# Altium PCB handMpuPcb.PcbDoc
Units mm, origin at the board's own origin, x right, y up, seen from the top; angles counter-clockwise.
Board outline 39.35 x 41.85 mm, 2 copper layers (Top Layer, Bottom Layer); 45 components, 26 nets, 187 pads, 26 vias.
Unrouted connection lines stored in the file: 58.
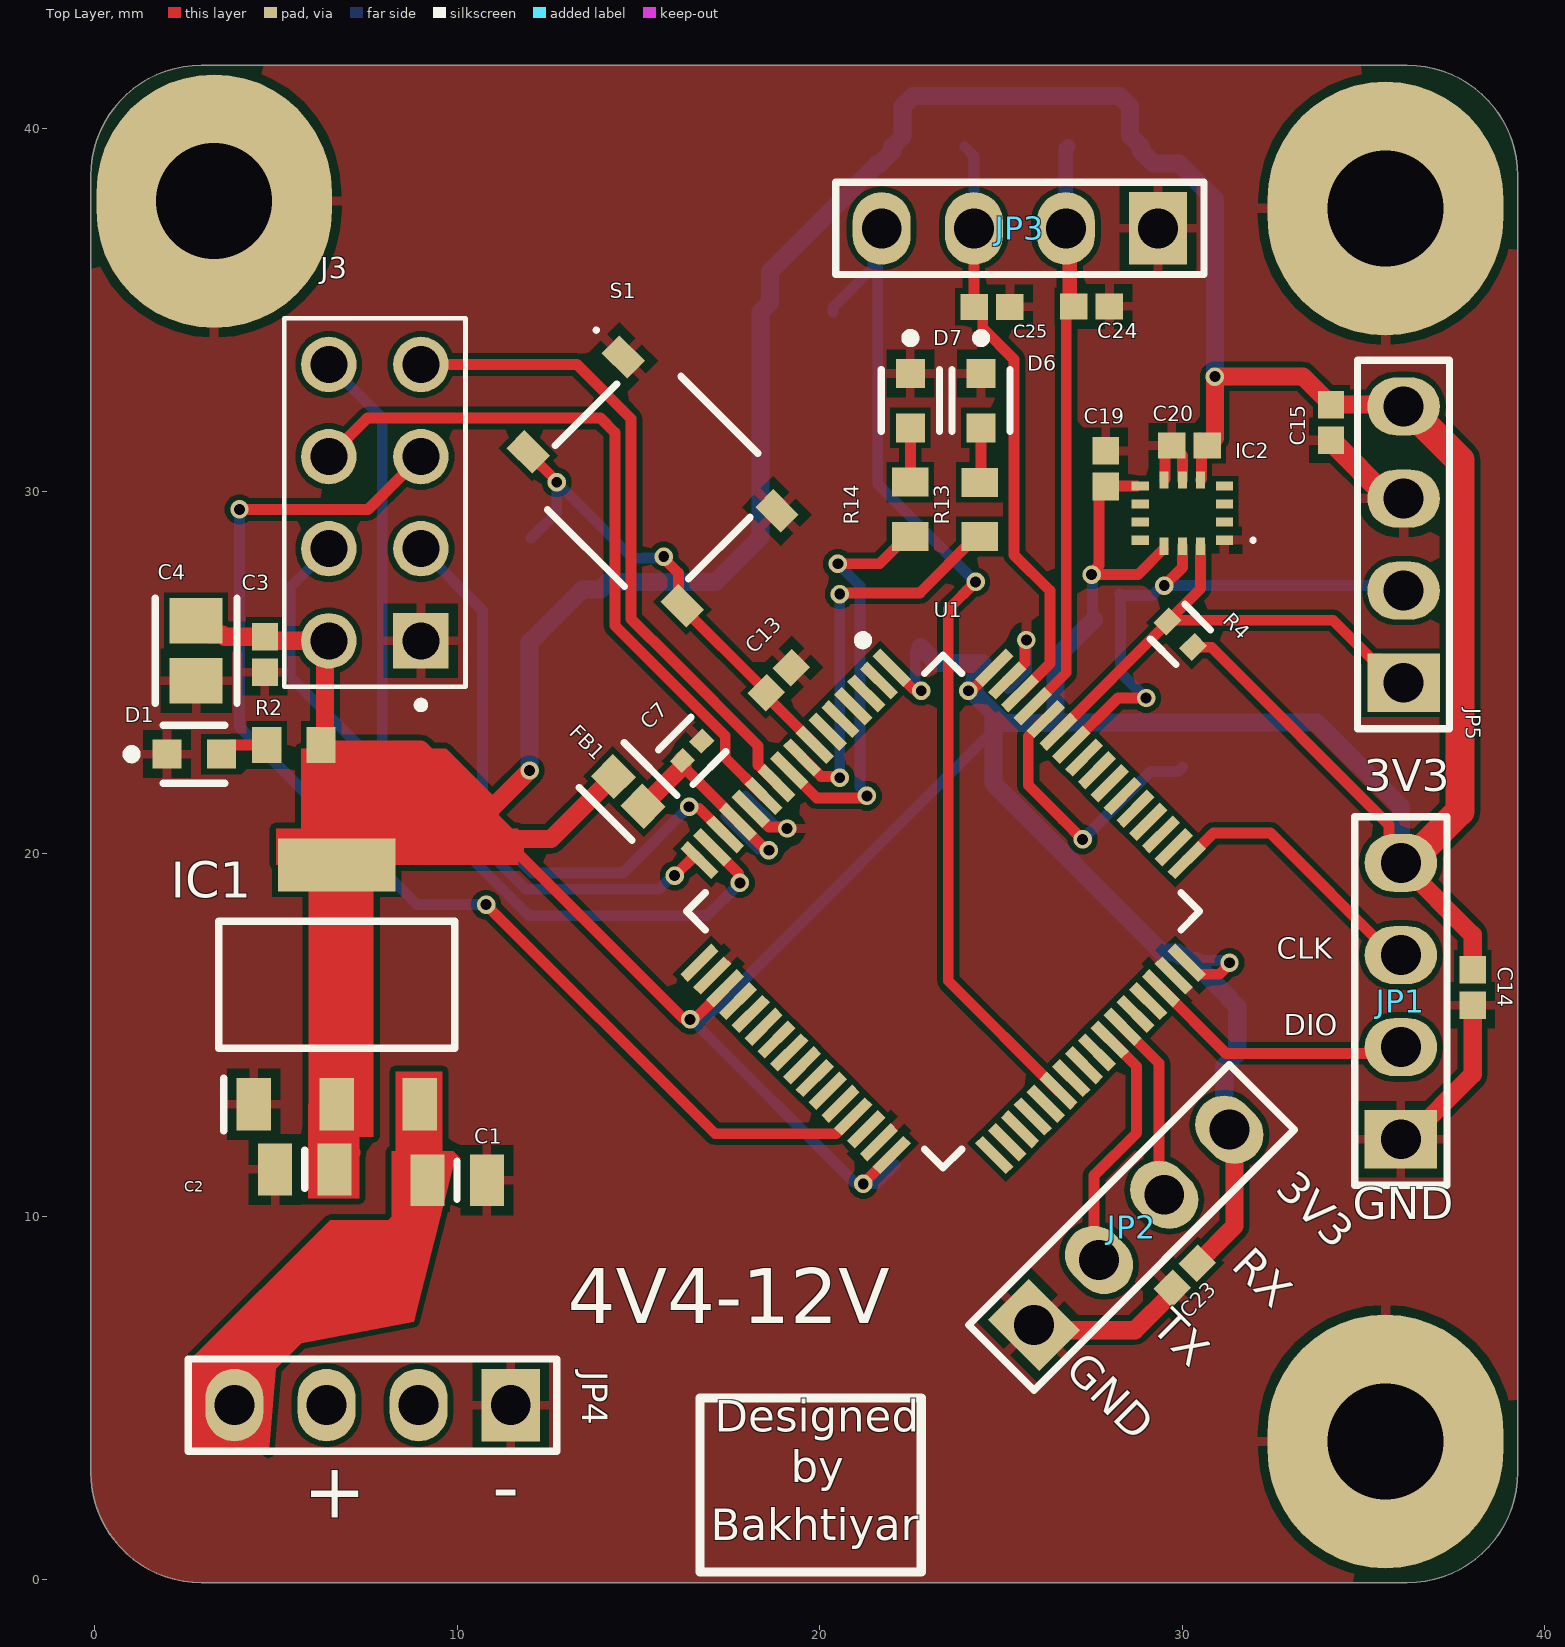
[diagram p0: Top Layer view]
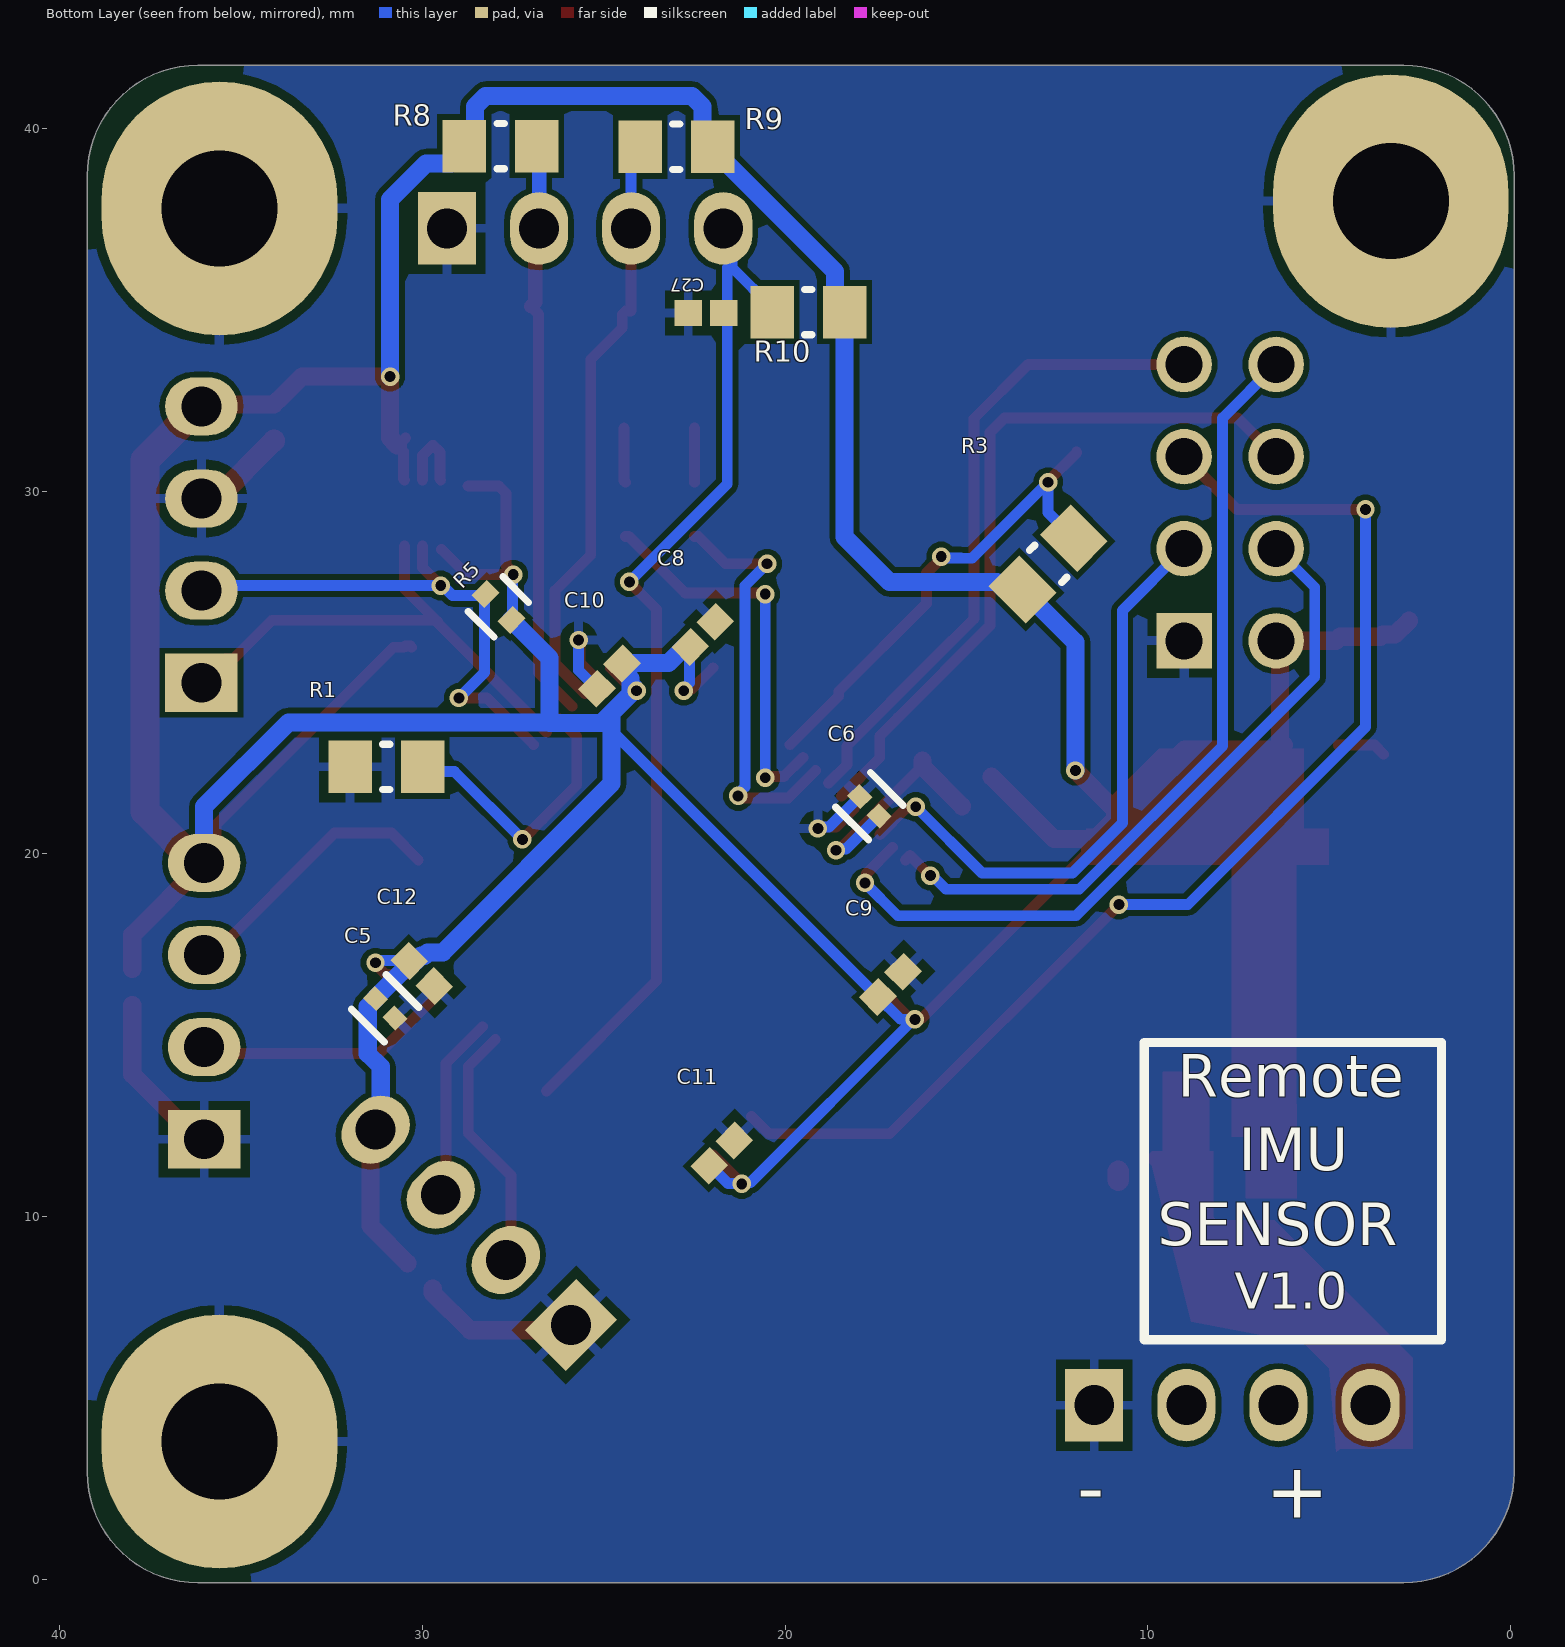
[diagram p1: Bottom Layer view, seen from below]
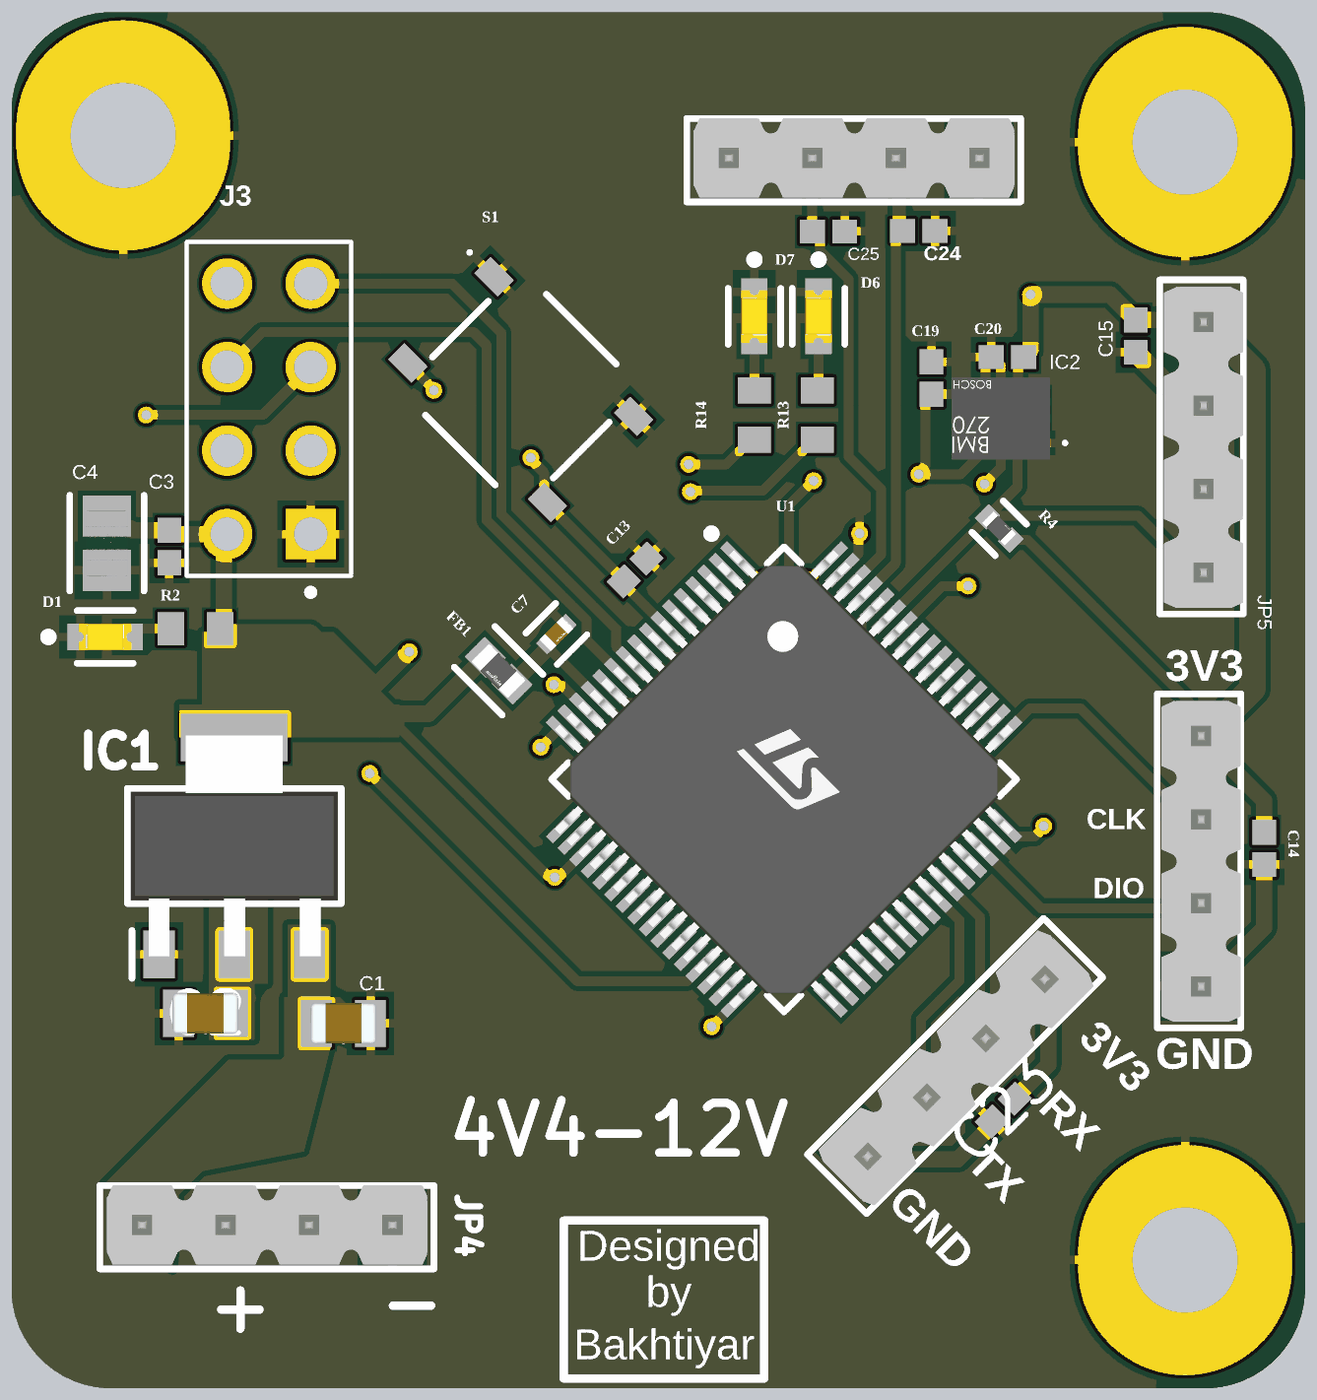
[diagram p2: 3D render of the assembled board from above, using the file's embedded part models]
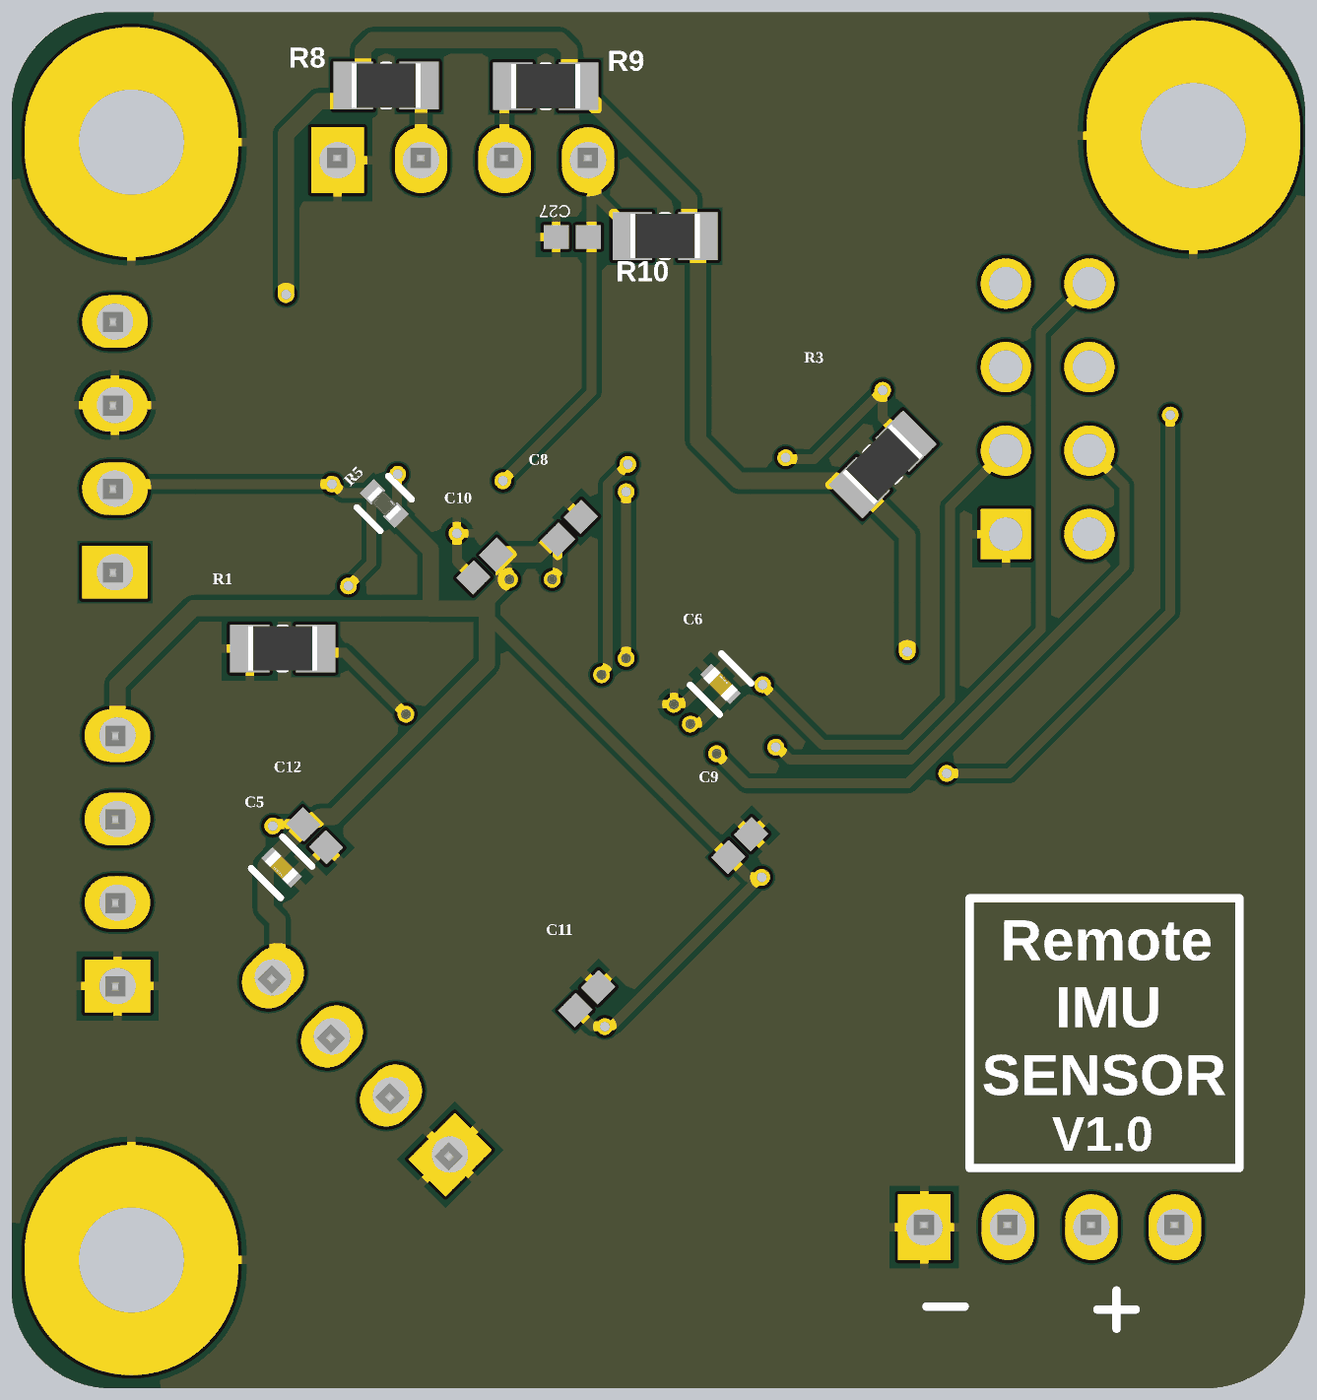
[diagram p3: 3D render of the assembled board from below, using the file's embedded part models]

## Layer stack, top to bottom
Top Solder: solder mask 0.0102, Solder Resist, Dk 3.5
Top Layer: signal copper 0.0356
Dielectric 1: dielectric 0.32, FR-4, Dk 4.8
Bottom Layer: signal copper 0.0356
Bottom Solder: solder mask 0.0102, Solder Resist, Dk 3.5

## Board outline
-0.1,2.948 -0.1,38.702 cw(c2.948,38.702) 2.948,41.75 36.202,41.75 cw(c36.202,38.702) 39.25,38.702 39.25,2.948 cw(c36.202,2.948) 36.202,-0.1 2.948,-0.1 cw(c2.948,2.948)

## Design rules (kind name [scope] priority, off if disabled: settings)
Clearance Clearance_USB_Polygon [(InNet('USB_D_N') OR InNet('USB_D_P')) vs InNamedPolygon('Gnd_p_t')] p1: gap=0.6 ignorepadtopadclearanceinfootprint=FALSE
Clearance Clearance_1 [All] p2: gap=0.15 ignorepadtopadclearanceinfootprint=FALSE
ComponentClearance ComponentClearance_1 [InComponent('J3')] p1: gap=0.15 collisioncheckmode=3 verticalgap=0.254 showdistances=FALSE donotcheckwithout3dbody=TRUE
ComponentClearance [All] p2: gap=0.15 collisioncheckmode=3 verticalgap=0.15 showdistances=FALSE
DiffPairsRouting [All] p1: maxlimit=0.173 minlimit=0.173 mostfreqgap=0.173 toplayer_minwidth=0.158 toplayer_maxwidth=0.158 toplayer_prefwidth=0.158 bottomlayer_minwidth=0.158 bottomlayer_maxwidth=0.158 bottomlayer_prefwidth=0.158 impedanceprofiledriven=TRUE impedanceprofileid={51E5E07A-7B61-4B88-A689-972FE56ABA06} maxuncoupledlength=12.7
HoleSize [All] p1: absolutevalues=TRUE maxlimit=6 minlimit=0.3 maxpercent=80.000 minpercent=20.000
MinimumSolderMaskSliver [All] p1: minsoldermaskwidth=0.01
PlaneConnect [All] p1: planeconnectstyle=Direct reliefexpansion=0.508 reliefentries=4 reliefconductorwidth=0.254 reliefairgap=0.254
PolygonConnect [All] p1: connectstyle=Relief reliefconductorwidth=0.254 reliefentries=4 polygonreliefangle="90 Angle" airgapwidth=0.254
RoutingVias [All] p1: holewidth=0.254 width=0.508 viastyle="Through Hole" minholewidth=0.3 minwidth=0.45 maxholewidth=0.711 maxwidth=1.27
SilkToSilkClearance [All] p1: silktosilkclearance=0.1
SilkToSolderMaskClearance [IsPad] p1: minsilkscreentomaskgap=0.1 clearancetoexposedcopper=TRUE
SolderMaskExpansion [All] p1: expansion=0.102 istentingtop=FALSE
SupplyNets "Schematic Supply Nets_3" [InNet('Vbat')] p1: voltage=0.000
SupplyNets "Schematic Supply Nets_1" [InNet('+3VA3')] p2: voltage=0.000
SupplyNets "Schematic Supply Nets_2" [InNet('GND')] p3: voltage=0.000
SupplyNets "Schematic Supply Nets" [InNet('+3V3')] p4: voltage=0.000
Width [All] p1: maxlimit=0.8 minlimit=0.254 preferedwidth=0.254
23 further rules are at their usual default settings.

## Classes and differential pairs
component class mpustm: C1 C2 C5 C6 C7 C8 C9 C10 C11 C12 C13 C14 D1 FB1 IC1 JP1 JP4 R1 R2 R3 S1 U1
component class mpuhand2: C3 C4 C15 C19 C20 C23 C24 C25 C27 D6 D7 IC2 J3 JP2 JP3 JP5 R4 R5 R8 R9 R10 R13 R14

## Components (designator, comment, footprint, x,y, rotation, side; value= is the part's Value field where it differs from the comment)
C1 "10uF" CAPC2012X140N 10,11 r0 top
C2 "22uF" CAPC2012X140N 5.803,11.301 r180 top
C3 "100nF" CAPC1050X55X23ML05T13 4.7,25.5 r90 top
C4 "10uF" FP-CL21-IPC_B 2.804,25.603 r270 top
C5 "4.7uF" FP-CL282-IPC_C 31.031,15.743 r225 bottom
C6 "10nF" FP-CL165-IPC_C 17.679,21.317 r45 bottom
C7 "1uF" FP-CL511-IPC_C 16.479,22.842 r45 top
C8 "100nF" CAPC1050X55X23ML05T13 22.276,26.055 r315 bottom
C9 "100nF" CAPC1050X55X23ML05T13 17.096,16.404 r315 bottom
C10 "100nF" CAPC1050X55X23ML05T13 24.846,24.904 r135 bottom
C11 "100nF" CAPC1050X55X23ML05T13 21.75,11.75 r315 bottom
C12 "100nF" CAPC1050X55X23ML05T13 30.025,16.703 r45 bottom
C13 "100nF" CAPC1050X55X23ML05T13 18.871,24.791 r225 top
C14 "0.1uF" CAPC1050X55X23ML05T13 38.007,16.32 r90 top
C15 "0.1uF" CAPC1050X55X23ML05T13 34.1,31.9 r270 top
C19 "0.1uF" CAPC1050X55X23ML05T13 27.887,30.622 r270 top
C20 "0.1uF" CAPC1050X55X23ML05T13 30.197,31.264 r0 top
C23 "0.1uF" CAPC1050X55X23ML05T13 30.068,8.365 r225 top
C24 "100nF" CAPC1050X55X23ML05T13 27.5,35.1 r0 top
C25 "100nF" CAPC1050X55X23ML05T13 24.756,35.087 r180 top
C27 "100nF" CAPC1050X55X23ML05T13 22.188,34.913 r180 bottom
D1 "Led" FP-LTST-C191GKT-MFG 2.75,22.75 r0 top
D6 "Led" FP-LTST-C191GKT-MFG 24.45,32.5 r270 top
D7 "Led" FP-LTST-C191GKT-MFG 22.5,32.5 r270 top
FB1 "120R" FP-BLM18-0_15-t0_8-IPC_C 14.717,21.722 r315 top
IC1 "AMS1117-3.3" SOT229P700X180-4N 6.681,16.394 r90 top
IC2 "BMI270" BMI270 30,29.4 r180 top
J3 "DS1021-2X4SF162-B" CONNFLY_DS1021-2X4SF162-B 7.733,29.687 r90 top
JP1 "HDR 1x4" "HDR Male1_4 2.54mm" 36.025,12.131 r180 top
JP2 "HDR 1x4" "HDR Male1_4 2.54mm" 25.908,7.008 r135 top
JP3 "HDR 1x4" "HDR Male1_4 2.54mm" 29.33,37.25 r270 top
JP4 "HDR 1x4" "HDR Male1_4 2.54mm" 11.48,4.8 r270 top
JP5 "HDR 1x4" "HDR Male1_4 2.54mm" 36.1,24.72 r180 top
R1 "10kOhm" RESC2013X60X35ML10T20 31,22.4 r180 bottom
R2 "220Ohm" RESC1608X55X25ML10T15 5.502,23.003 r0 top
R3 "10kOhm" RESC2013X60X35ML10T20 12.75,28 r315 bottom
R4 "4k7Ohm" FP-RC0402-0_4-MFG 29.946,26.054 r315 top
R5 "4k7Ohm" FP-RC0402-0_4-MFG 27.909,26.81 r225 bottom
R8 "10kOhm" RESC2013X60X35ML10T20 27.852,39.519 r0 bottom
R9 "10kOhm" RESC2013X60X35ML10T20 23,39.5 r180 bottom
R10 "10kOhm" RESC2013X60X35ML10T20 19.365,34.942 r180 bottom
R13 "220Ohm" RESC1608X55X25ML10T15 24.411,29.499 r270 top
R14 "220Ohm" RESC1608X55X25ML10T15 22.5,29.5 r270 top
S1 "Button" GSPTS004901 15.394,30.272 r315 top
U1 "STM32L476RGT6TR" FP-LQFP64-5W-MFG 23.402,18.416 r315 top

## Footprints (in the part's own frame and the unit in brackets; to place one, negate y for a bottom-side part, rotate by r counter-clockwise, add the part's x,y. Pads: shape width x height; smd on the part's side, far side on the other; paste and mask are expansions set on the pad)
BMI270 [mm]
  rect 0.475x0.25 smd: 1(-1.163,0.75) 2(-1.163,0.25) 3(-1.163,-0.25) 4(-1.163,-0.75) 8(1.162,-0.75) 9(1.162,-0.25) 10(1.162,0.25) 11(1.162,0.75)
  rect 0.25x0.475 smd: 5(-0.5,-0.913) 6(0,-0.913) 7(0.5,-0.913) 12(0.5,0.913) 13(0,0.913) 14(-0.5,0.913)
  silkscreen extent -2,0.7 -1.9,0.8, body extent -1.5,-1.25 1.5,1.25, height 0.83
CAPC1050X55X23ML05T13 [mm] "Chip Capacitor, 2-Leads, Body 1.05x0.55mm, IPC Low Density"
  rect 0.76x0.72 smd: 1(-0.49,0) 2(0.49,0)
  body extent -0.53,-0.28 0.53,0.27, height 0.55
CAPC2012X140N [mm]
  rect 0.94x1.43 smd: 1(-0.82,0) 2(0.82,0)
  silkscreen extent 0,-0.53 0,0.53, body extent -1,-0.63 1,0.63, height 1.4
CONNFLY_DS1021-2X4SF162-B [mm]
  rect 1.53x1.53 / inner round 1.53 / far side rect 1.53x1.53 hole 1.02 mask+0.102: 1(-3.81,-1.27)
  round 1.53 hole 1.02 mask+0.102: 2(-3.81,1.27) 3(-1.27,-1.27) 4(-1.27,1.27) 5(1.27,-1.27) 6(1.27,1.27) 7(3.81,-1.27) 8(3.81,1.27)
  silkscreen extent -5.68,-2.5 5.08,2.5
FP-BLM18-0_15-t0_8-IPC_C [mm]
  rect 0.906x0.858 smd paste+0 mask+0: 1(-0.576,0) 2(0.576,0)
  silkscreen extent -1.03,-0.88 1.03,0.88, body extent -0.8,-0.4 0.8,0.4, height 0.95
FP-CL21-IPC_B [mm]
  rect 1.255x1.456 smd paste+0 mask+0: 1(-0.826,0) 2(0.826,0)
  silkscreen extent -1.45,-1.13 1.45,1.13, body extent -1,-0.63 1,0.63, height 1.45
FP-CL165-IPC_C [mm]
  rect 0.515x0.472 smd paste+0 mask+0: 1(-0.379,0) 2(0.379,0)
  silkscreen extent -0.64,-0.67 0.64,0.67, body extent -0.5,-0.25 0.5,0.25, height 0.55
FP-CL282-IPC_C [mm]
  rect 0.515x0.472 smd paste+0 mask+0: 1(-0.379,0) 2(0.379,0)
  silkscreen extent -0.64,-0.67 0.64,0.68, body extent -0.5,-0.25 0.5,0.25, height 0.55
FP-CL511-IPC_C [mm]
  rect 0.515x0.472 smd paste+0 mask+0: 1(-0.379,0) 2(0.379,0)
  silkscreen extent -0.64,-0.67 0.64,0.67, body extent -0.5,-0.25 0.5,0.25, height 0.55
FP-LQFP64-5W-MFG [mm]
  rect 1.2x0.3 smd paste+0 mask+0: 1(-5.75,3.75) 2(-5.75,3.25) 3(-5.75,2.75) 4(-5.75,2.25) 5(-5.75,1.75) 6(-5.75,1.25) 7(-5.75,0.75) 8(-5.75,0.25) 9(-5.75,-0.25) 10(-5.75,-0.75) 11(-5.75,-1.25) 12(-5.75,-1.75) 13(-5.75,-2.25) 14(-5.75,-2.75) 15(-5.75,-3.25) 16(-5.75,-3.75) 33(5.75,-3.75) 34(5.75,-3.25) 35(5.75,-2.75) 36(5.75,-2.25) 37(5.75,-1.75) 38(5.75,-1.25) 39(5.75,-0.75) 40(5.75,-0.25) 41(5.75,0.25) 42(5.75,0.75) 43(5.75,1.25) 44(5.75,1.75) 45(5.75,2.25) 46(5.75,2.75) 47(5.75,3.25) 48(5.75,3.75)
  rect 0.3x1.2 smd paste+0 mask+0: 17(-3.75,-5.75) 18(-3.25,-5.75) 19(-2.75,-5.75) 20(-2.25,-5.75) 21(-1.75,-5.75) 22(-1.25,-5.75) 23(-0.75,-5.75) 24(-0.25,-5.75) 25(0.25,-5.75) 26(0.75,-5.75) 27(1.25,-5.75) 28(1.75,-5.75) 29(2.25,-5.75) 30(2.75,-5.75) 31(3.25,-5.75) 32(3.75,-5.75) 49(3.75,5.75) 50(3.25,5.75) 51(2.75,5.75) 52(2.25,5.75) 53(1.75,5.75) 54(1.25,5.75) 55(0.75,5.75) 56(0.25,5.75) 57(-0.25,5.75) 58(-0.75,5.75) 59(-1.25,5.75) 60(-1.75,5.75) 61(-2.25,5.75) 62(-2.75,5.75) 63(-3.25,5.75) 64(-3.75,5.75)
  silkscreen extent -6.97,-5 5,5, body extent -6.45,-6.45 6.45,6.45, height 0.25
FP-LTST-C191GKT-MFG [mm]
  rect 0.8x0.8 smd paste+0 mask+0: 1(-0.75,0) 2(0.75,0)
  silkscreen extent -1.85,-0.8 0.85,0.8, body extent -1.25,-0.55 1.25,0.55, height 0.25
FP-RC0402-0_4-MFG [mm]
  rect 0.5x0.6 smd paste+0 mask+0: 1(-0.5,0) 2(0.5,0)
  silkscreen extent -0.5,-0.67 0.5,0.67, body extent -0.5,-0.25 0.5,0.25, height 0.4
GSPTS004901 [mm]
  rect 1x0.7 smd: 1(-3,1.85) 2(3,1.85) 3(-3,-1.85) 4(3,-1.85)
  silkscreen extent -4.1,-2.6 2.6,2.6
"HDR Male1_4 2.54mm" [mm]
  rect 2x1.6 hole 1.1: 1(0,0)
  oval 2x1.6 hole 1.1: 2(0,-2.54) 3(0,-5.08) 4(0,-7.62)
  silkscreen extent -1.27,-8.89 1.27,1.27, body extent -1.27,-8.68 1.14,1.08, height 8.39
RESC1608X55X25ML10T15 [mm] "Chip Resistor, 2-Leads, Body 1.70x0.90mm, IPC Low Density"
  rect 0.8x1 smd: 1(-0.75,0) 2(0.75,0)
  body extent -0.85,-0.45 0.85,0.45, height 0.55
RESC2013X60X35ML10T20 [mm] "Chip Resistor, 2-Leads, Body 2.1x1.35mm, IPC Low Density"
  rect 1.2x1.45 smd: 1(-1,0) 2(1,0)
  silkscreen extent -0.1,-0.63 0.1,0.63, body extent -1.05,-0.68 1.05,0.67, height 0.6
SOT229P700X180-4N [mm]
  rect 1.45x0.95 smd: 1(-3.3,2.29) 2(-3.3,0) 3(-3.3,-2.29)
  rect 1.45x3.25 smd: 4(3.3,0)
  silkscreen extent -4.02,-3.25 1.75,3.25, body extent -3.36,-3.15 3.35,3.15, height 1.8

## Part data
C1: library part CL21A106KOQNNNE, "Capacitor", Manufacturer_Name=SAMSUNG, Mouser Part Number=187-CL21A106KOQNNNE, Arrow Part Number=CL21A106KOQNNNE, Arrow Price/Stock=https://www.arrow.com/en/products/cl21a106koqnnne/samsung-electro-mechanics?utm_currency=USD&region=nac, Datasheet Link=https://datasheet.datasheetarchive.com/originals/distributors/Datasheets_SAMA/0289c6d4f30f89b64e7dd5b6a9ee99f0.pdf, Height=1.4mm, Manufacturer_Part_Number=CL21A106KOQNNNE, Mouser Price/Stock=https://www.mouser.co.uk/ProductDetail/Samsung-Electro-Mechanics/CL21A106KOQNNNE?qs=349EhDEZ59qKIX0T0PKtPw%3D%3D
C2: library part CL21A226MQQNNNE, "Capacitor", Manufacturer_Name=SAMSUNG, Mouser Part Number=187-CL21A226MQQNNNE, Arrow Part Number=CL21A226MQQNNNE, Arrow Price/Stock=https://www.arrow.com/en/products/cl21a226mqqnnne/samsung-electro-mechanics.html?utm_currency=USD&region=nac, Datasheet Link=http://product.samsungsem.com/mlcc/basic-search.do?partNumber=CL21A226MQQNNN, Height=1.4mm, Manufacturer_Part_Number=CL21A226MQQNNNE, Mouser Price/Stock=https://www.mouser.co.uk/ProductDetail/Samsung-Electro-Mechanics/CL21A226MQQNNNE?qs=349EhDEZ59oZnQF%252BO1HZ%252BQ%3D%3D
C3 C8 C9 C10 C11 C12 C13 C14 C15 C19 C20 C23 C24 C25 C27: library part CMP-2000-05439-1, "Chip Capacitor, 100 nF, +/- 10%, 16 V, -55 to 125 degC, 0402 (1005 Metric), RoHS, Tape and Reel", Capacitance=100000pF, Case Size/Dimension=0402, Dielectric=X7R, Manufacturer="Samsung Electro-Mechanics", Rated Voltage=16V, Tolerance (%)=±10%, Datasheet URL=https://datasheet.ciiva.com/29198/458718-da-01-en-vs-kondensator-0402-29198423.pdf, Datasheet Version=Nov-10, Manufacturer URL=http://www.samsungsem.com/global/index.jsp
C4: library part CMP-2000-06102-2, "CL21 Series 0805 10uF 16V ±10% Tolerance X5R Multilayer Ceramic Chip Capacitor", Case Code (Imperial)=0805, Case Code (Metric)=2012, Dielectric=X7R, Max Operating Temperature=85°C, Min Operating Temperature=-55°C, Package Quantity=1, Tolerance=10%, Voltage=16V, Capacitance=10uF, Case/Package=0805, Depth=1.25mm, Height=1.25mm, Lead Free="Lead Free", Length=2mm, Mount="Surface Mount", Packaging="Tape and Reel", Radiation Hardening=No, Thickness=0.055inch, Voltage Rating=16V, Voltage Rating (DC)=16V, Width=0.049inch
C5: library part CMP-13271-000548-1, "Cap Ceramic 4.7uF 10V X5R ±20% SMD 0402 +85°C Paper T/R", Case Code (Imperial)=0402, Case Code (Metric)=1005, Dielectric=X5R, Max Operating Temperature=85°C, Min Operating Temperature=-55°C, Package Quantity=10000, Tolerance=20%, Voltage Rating=10V, Capacitance=4.7uF, Case/Package=0402, Lead Free="Lead Free", Length=0.039inch, Mount="Surface Mount", Packaging="Tape and Reel", Thickness=0.022inch, Width=0.02inch
C6: library part CMP-13271-000387-1, "Cap Ceramic 10nF 50V X7R ±10% SMD 0402 +125°C Paper T/R", Case Code (Imperial)=0402, Case Code (Metric)=1005, Dielectric=X7R, Max Operating Temperature=125°C, Min Operating Temperature=-55°C, Package Quantity=1, Tolerance=10%, Voltage=50V, Capacitance=10nF, Case/Package=0402, Contact Plating=Tin, Depth=0.5mm, Height=0.5mm, Lead Free="Lead Free", Length=1mm, Material=Ceramic, Mount="Surface Mount", Packaging="Tape and Reel", Radiation Hardening=No, Thickness=0.022inch, Voltage Rating=50V, Voltage Rating (DC)=50V, Width=0.02inch
C7: library part CMP-13271-001936-1, "Cap Ceramic 1uF 10V X5R ±10% SMD 0402 +85°C Paper T/R", Case Code (Imperial)=0402, Case Code (Metric)=1005, Dielectric=X5R, Max Operating Temperature=85°C, Min Operating Temperature=-55°C, Package Quantity=1, Tolerance=10%, Voltage Rating=10V, Capacitance=1uF, Case/Package=0402, Contact Plating=Tin, Depth=0.5mm, Height=0.5mm, Length=1mm, Material=Ceramic, Mount="Surface Mount", Packaging="Tape and Reel", Radiation Hardening=No, Thickness=0.022inch, Width=0.02inch
D1 D6 D7: library part CMP-22017-000029-1, "LED GREEN CLEAR CHIP SMD", Case Code (Imperial)=0603, Case Code (Metric)=1608, Color=Green, Forward Current=30mA, Forward Voltage=2.1V, Lens Color=Colorless, Max Operating Temperature=85°C, Min Operating Temperature=-55°C, Package Quantity=1, Power Dissipation=100mW, Reverse Voltage=5V, Test Current=20mA, Case/Package=0603, Depth=0.8mm, Dominant Wavelength=569nm, Height=0.55mm, Illumination Color=Green, Lead Free="Lead Free", Length=1.6mm, Lens Style=Clear, Lens Transparency=Clear, Luminous Intensity=12mcd, Mount="Surface Mount", Number of Elements=1, Number of LEDs=1, Number of Pins=2, Packaging="Tape and Reel", Power Rating=100mW, Radiation Hardening=No, Viewing Angle=130°, Wavelength=565nm, Width=0.8mm
FB1: library part CMP-0686-00425-3, "Chip Ferrite Bead, 0603, 5Ω @ 100MHz, 0.05Ω, 25%, 800mA", Case Code (Imperial)=0603, Case Code (Metric)=1608, Current Rating=700mA, DC Resistance (DCR)=50mR, Max Operating Temperature=125°C, Min Operating Temperature=-55°C, Package Quantity=1, Test Frequency=100MHz, Tolerance=25%, Case/Package=0603, Core Material=Ferrite, DC Current=700mA, Depth=0.8mm, Height=0.8mm, Impedance=5R, Lead Free="Lead Free", Length=1.6mm, Material=Ferrite, Max Current Rating=700mA, Max DC Current=700mA, Military Standard=Not, Number of Circuits=1, Number of Lines=1, Number of Pins=2, Packaging="Tape and Reel", Radiation Hardening=No, REACH SVHC="No SVHC", Shielding=Unshielded, Termination=SMD/SMT, Width=0.8mm
IC1: "Integrated Circuit", Manufacturer_Name=Advanced, Datasheet Link=https://datasheet.datasheetarchive.com/originals/distributors/Datasheets-28/DSA-550594.pdf, Height=1.8mm, Manufacturer_Part_Number=AMS1117-3.3
IC2: "Integrated Circuit", Manufacturer_Name=BOSCH, Mouser Part Number=262-BMI270, Arrow Part Number=BMI270, Arrow Price/Stock=https://www.arrow.com/en/products/bmi270/bosch-sensortec?utm_currency=USD&region=europe, Datasheet Link=https://www.bosch-sensortec.com/media/boschsensortec/downloads/datasheets/bst-bmi270-ds000.pdf, Height=0.87mm, Manufacturer_Part_Number=BMI270, Mouser Price/Stock=https://www.mouser.co.uk/ProductDetail/Bosch-Sensortec/BMI270?qs=u16ybLDytRYIj%252BjQEee88A%3D%3D
J3: "Pin header; pin strips; male; PIN: 8; straight; 2.54mm; THT; 2x4", Package=None, Check_prices=https://www.snapeda.com/parts/DS1021-2X4SF162-B/Connfly/view-part/?ref=eda, MF=Connfly, MP=DS1021-2X4SF162-B, SnapEDA_Link=https://www.snapeda.com/parts/DS1021-2X4SF162-B/Connfly/view-part/?ref=snap
JP1 JP2 JP3 JP4 JP5: library part 68001-204HLF, "CONN HEADER VERT 4POS 2.54MM", Color=Black, Current Rating=3A, Flammability Rating="UL94 V-0", Insulation Resistance=5GR, Manufacturer="Amphenol FCI", Max Operating Temperature=125°C, Min Operating Temperature=-65°C, Package Quantity=100, Supplier Part Number 1=609-3402-ND, Voltage Rating=1.5kV, Category="Headers and Wire Housings", ComponentLink1Description=https://datasheet.ciiva.com/5164/68000-274255-5164127.pdf?src-supplier=Mouser, ComponentLink1URL=https://datasheet.ciiva.com/5164/68000-274255-5164127.pdf?src-supplier=Mouser, ComponentLink2Description=https://datasheet.ciiva.com/726/68000-726529.pdf?src-supplier=Digi-Key, ComponentLink2URL=https://datasheet.ciiva.com/726/68000-726529.pdf?src-supplier=Digi-Key, Connector Type="Male Pin", Contact Gender=Male, Contact Material=Bronze, Contact Mating Length=0.23inch, Contact Plating=Gold,GXT, Contact Post Length=3.05mm, Gender=Male, Housing Material=Thermoplastic, Manufacturer Part Number=68001-204HLF, Mount="Through Hole", Number of Contacts=4, Number of Positions=4, Number of Rows=1, Orientation=Straight, Packaging=Bulk, Pitch=2.54mm, Pricing 1="1=0,38000, 10=0,35700, 100=0,25010, 500=0,21442, 1000=0,17868, 5000=0,15315, 10000=0,14294 (USD)", Radiation Hardening=No, RoHS=Yes, Stock 1=2857, Supplier 1=Digi-Key, Termination=Solder
R1 R3 R8 R9 R10: library part CMP-2000-05025-1, "Chip Resistor, 10 KOhm, +/- 5%, 0.125 W, -55 to 155 degC, 0805 (2012 Metric), RoHS, Tape and Reel", Manufacturer=Yageo, Package Description="2-Pin Surface Mounted Device, Body 2 x 1.25 mm", Package Reference=805, Power Rating=250mW, Resistance=10kohm, Resistance Tolerance=±5%, Resistor Case Style=0805[2012Metric], Resistor Element Type=ThickFilm, Temperature Coefficient=±100ppm/degC, Voltage Rating=150V, Automotive Qualification Standard=-, Datasheet URL=http://www.yageo.ru/pdf/RC0805.pdf, Datasheet Version="REV. 2, 09/2004", Manufacturer URL=http://www.yageo.com/, MSL=MSL1-Unlimited, Packaging=CutTape, Product Range=RCSeries, SVHC=ToBeAdvised
R2 R13 R14: library part CMP-1659-00018-2, "General Purpose Chip Resistors, 220 Ohm, +/- 1%, -55 to 155 degC, 0603 (1608 Metric), RoHS, Tape and Reel", ComponentLink1Description="Manufacturer URL", ComponentLink1URL=http://www.yageo.com/, ComponentLink2Description=Datasheet, ComponentLink2URL=https://datasheet.ciiva.com/11808/0900766b80f96399-11808136.pdf, DatasheetVersion="Rev. 4, 04/2009", PackageDescription="2-Pin Surface Mount Device, Body 1.6 x 0.8 mm", PackageReference=0603, RoHSCompliant=false
R4 R5: library part CMP-2002-08011-2, Case Code (Imperial)=0402, Max Operating Temperature=155°C, Max Power Dissipation=63mW, Min Operating Temperature=-55°C, Resistance=4.7kΩ, Temperature Coefficient=100ppm/°C, Tolerance=5%, Voltage Rating=50V, Case/Package=0402, Composition="Thick Film", Depth=500µm, Features="Moisture Resistant", Height=350µm, Lead Free="Lead Free", Length=1mm, Military Standard=Not, Number of Pins=2, Number of Terminations=2, Packaging="Tape & Reel", Power Rating=63mW, REACH SVHC="No SVHC", RoHS=Compliant, Schedule B="8533210045, 8533210045", Termination=SMD/SMT, Voltage Rating (AC)=50V, Voltage Rating (DC)=50V, Width=500µm
S1: library part GSPTS004901, "Switch (4-Pin Push)", Manufacturer_Name="C & K COMPONENTS", Datasheet Link=https://www.ckswitches.com/media/2780/pts526.pdf, Height=1.65mm, Manufacturer_Part_Number=GSPTS004901
U1: library part CMP-12105-000039-1, "IC MCU 32BIT 1MB FLASH 64LQFP", Ambient Temperature Range High=+85°C, Ambient Temperature Range Low=-40°C, Frequency=80MHz, LCSC Part Number=C2054081, Manufacturer=STMicroelectronics, Max Junction Temp=+105°C, Max Supply Voltage=3.6V, Min Supply Voltage=1.71V, Package=LQFP64-5W, Temperature="-40°C to +105°C", Automotive=No, Category=IC, ComponentLink2Description=Datasheet, ComponentLink2URL=https://www.st.com/content/ccc/resource/technical/document/datasheet/c5/ed/2f/60/aa/79/42/0b/DM00108832.pdf/files/DM00108832.pdf/jcr:content/translations/en.DM00108832.pdf, Core Architecture="ARM Cortex-M4", Data Bus Width=32bits, Device Class L1="Integrated Circuits (ICs)", Device Class L2="Embedded Processors and Controllers", Device Class L3=Microcontrollers, Digikey Description="IC MCU 32BIT 1MB FLASH 64LQFP", Height=1.6mm, Interface=I2C,SPI,UART,USART,CAN,USB,LIN,IrDA,SMBus,Other, Ipc Land Pattern Name=QFP50P1200X1200X160-64, Lead Free=Yes, Manufacturer Part Number=STM32L476RGT6TR, Memory Size=1MBytes, Memory Type=FLASH, Mouser Description="MCU 32-Bit STM32 ARM Cortex M4 RISC 1MB Flash 1.8V/2.5V/3.3V 64-Pin LQFP T/R", Number Of A/D Converters=3, Number Of Adc Channels=16, Number Of Cores=1, Number Of I2C Channels=3, Number Of I/Os=51, Number Of Pwm Channels=28, Number Of Spi Channels=3, Number Of Timers/Counters=13, Number Of Uart Channels=6, Number Of Usb Channels=1, Octopart=https://octopart.com/stm32l476rgt6tr-stmicroelectronics-74146120, Ram Size=128KBytes, RoHS=TRUE, Standoff Height=0.05mm, Temperature Range High=+105°C, Temperature Range Low=-40°C

## Free pads (board coordinates)
  oval 6.5x7 hole 3.2: 3(3.3,38) 3(35.6,3.8) 3(35.6,37.8)

## Via types
v1: diameter 0.508, hole 0.3, Top Layer to Bottom Layer, 26 vias

## Nets (pads, with @x,y where several pads share a name; then routed paths per layer and width w, separated by ;. In a path a pad name is that pad's centre, name@x,y a point inside that pad or via, vN(x,y) a via of type N, cw(c..) or ccw(c..) an arc to the next point about the centre after c; other vN are vias at no path point)
+3V3: C2.1 C3.2 C4.1 C5.1 C8.2 C9.2 C10.2 C11.2 C12.2 C14.2 C15.1 C19.2 C20.2 C23.1 FB1.1 IC1.2 IC1.4 IC2.5 IC2.8 IC2.12 J3.2 JP1.4 JP2.4 JP5.4 R2.2 R3.2 R4.2 R5.2 R8.2 R9.2 R10.2 U1.1 U1.19 U1.32 U1.48 U1.64 | length 176.4
  Top Layer w0.3: 11.7,20.412 11.7,20 16.222,15.478 16.387,15.478 v1(16.427,15.438) ; v1@16.427,15.44 16.46,15.44 16.5,15.4 16.998,15.898 16.998,15.901 U1.19 ; v1(21.2,10.9) 21.2,10.91 U1.32 ; U1.1 22.581,24.54 22.76,24.54 v1(22.8,24.5) ; v1(24.1,24.5) 24.14,24.54 24.223,24.54 U1.64 ; C19.2@27.878,30.123 27.7,29.945 27.7,27.956 27.5,27.756 v1(27.5,27.7) 28.776,27.7 IC2.12@29.475,28.399 ; C19.2@27.896,30.141 IC2.8@28.751,30.141 ; U1.48 30.438,16.683 31.027,16.683 31.3,16.956 v1(31.3,17) ; R4.2 30.335,25.735 30.477,25.735 30.512,25.7 30.8,25.7 35.703,20.797 35.703,20.074 JP1.4@36.013,19.764 ; C20.2@30.475,31.474 30.685,31.264 C20.2 ; IC2.5 30.525,30.338 C20.2@30.525,31.091
  Top Layer w0.5: C4.1 3.181,26.052 3.528,26.052 3.59,25.99 C3.2 4.7,25.987 4.81,25.877 J3.2 6.357,25.772 6.357,23.108 R2.2 6.371,22.883 8.988,22.883 10.785,21.085 ; C2.1 6.623,11.546 6.843,11.766 C2.1@7.088,11.766 ; v1@11.998,22.298 10.9,21.2 10.9,20.971 11.459,20.412 11.7,20.412 12.593,20.412 FB1.1 ; C23.1 31.437,9.735 31.437,12.255 JP2.4 ; C20.2 30.707,31.264 30.817,31.374 30.817,31.394 30.897,31.474 v1(30.897,33.164) 33.326,33.164 33.97,32.52 33.99,32.52 34.1,32.41 C15.1 JP5.4@36.207,32.39 ; JP1.4 38.007,17.77 C14.2@38.007,16.83 ; JP5.4 JP5.4@36.3,32.34
  Top Layer w0.8: JP1.4 36.225,19.752 37.65,21.176 37.65,30.862 36.172,32.34 JP5.4
  Bottom Layer w0.3: v1(16.427,15.438) 16.429,15.44 16.826,15.44 C9.2 24.788,23.402 24.998,23.612 25.064,23.612 ; v1@16.5,15.4 20.96,10.94 21.16,10.94 v1(21.2,10.9) 21.21,10.91 21.575,10.91 C11.2@22.082,11.418 ; C8.2@22.778,25.708 22.636,25.567 22.636,24.72 22.8,24.556 v1(22.8,24.5) ; v1(24.1,24.5) 24.1,24.666 24.27,24.836 C10.2@24.514,25.08 ; v1(27.5,27.7) 27.52,27.68 27.52,26.492 R5.2 ; C12.2 30.385,17.064 31.18,17.064 31.244,17 v1(31.3,17)
  Bottom Layer w0.5: v1(12,22.3) 12,25.836 R3.2 13.952,27.293 14.159,27.5 17.13,27.5 18.365,28.735 R10.2 18.628,35.205 18.628,36.065 21.588,39.025 21.65,39.025 22,39.375 R9.2 22.279,39.779 22.279,40.607 22.571,40.9 28.262,40.9 28.554,40.607 28.554,39.816 R8.2 28.852,39.394 29.202,39.044 29.902,39.044 30.897,38.048 v1(30.897,33.164) ; C8.2@22.778,25.708 23.222,25.264 24.486,25.264 C10.2 ; 24.27,24.836 24.27,24.405 24.788,23.888 ; R5.2 26.5,25.402 26.5,23.626 ; C12.2@30.371,16.95 C5.1@31.299,16.022 ; C12.2 30.216,17.05 30.202,17.035 30.044,17.193 29.945,17.193 29.858,17.28 29.445,17.28 24.788,21.938 24.788,23.402 24.788,23.888 ; JP2.4 31.155,12.537 31.155,14.132 31.513,14.49 31.513,15.786 31.299,16 C5.1 ; JP1.4 36.025,21.302 33.701,23.626 26.5,23.626 ; 24.788,23.888 25.064,23.612 26.5,23.612 26.5,23.626
+3VA3: C6.1 C7.1 FB1.2 U1.13 | length 6.5
  Top Layer w0.3: 16.322,22.313 18.496,20.14 18.56,20.14 v1(18.6,20.1)
  Top Layer w0.5: FB1.2 16.216,22.406 16.216,22.57 C7.1
  Bottom Layer w0.3: C6.1 18.321,20.14 18.56,20.14 v1(18.6,20.1)
Boot: R1.2 U1.60 | length 7.7
  Top Layer w0.3: U1.60 25.75,23.239 25.75,21.9 26.696,20.954 v1(27.25,20.4)
  Bottom Layer w0.3: v1(27.25,20.4) 29.126,22.276 29.876,22.276 R1.2
But1: C24.1 JP3.2 R8.1 U1.61 | length 16
  Top Layer w0.3: U1.61 26.8,24.996 26.8,34.89 C24.1
  Top Layer w0.4: JP3.2 26.9,37.14 26.9,35.21 C24.1
  Bottom Layer w0.4: JP3.2 26.79,39.457 R8.1
But2: C25.2 JP3.3 R9.1 U1.62 | length 16.5
  Top Layer w0.3: JP3.3 24.25,34.974 24.398,34.974 24.496,34.877 24.496,34.504 25.362,33.638 25.362,28.247 26.35,27.259 26.35,25.253 U1.62
  Bottom Layer w0.3: R9.1 24.25,39.25 JP3.3
But3: C27.2 JP3.4 R10.1 U1.38 | length 28.3
  Top Layer w0.3: v1(24.3,27.5) 23.546,26.746 23.546,16.504 U1.38
  Bottom Layer w0.3: R10.1 20.365,35.067 21.461,36.164 21.461,37.001 JP3.4 ; 21.6,36.164 21.6,30.2 v1(24.3,27.5)
CE: J3.3 U1.14 | length 16.6
  Top Layer w0.3: v1(16.4,21.3) 16.44,21.26 16.668,21.26 U1.14
  Bottom Layer w0.3: J3.3 10.704,26.716 10.704,20.849 12.079,19.474 14.574,19.474 v1(16.4,21.3)
CSN: J3.4 U1.15 | length 20.8
  Top Layer w0.3: U1.15 17.76,19.461 17.76,19.24 v1(17.8,19.2)
  Bottom Layer w0.3: J3.4 5.398,27.352 5.398,24.882 11.984,18.296 16.896,18.296 v1(17.8,19.2)
GND: C1.2 C2.2 C3.1 C4.2 C5.2 C6.2 C7.2 C8.1 C9.1 C10.1 C11.1 C12.1 C13.1 C14.1 C15.2 C19.1 C20.1 C23.2 C24.2 C25.1 C27.1 D1.1 D6.1 D7.1 IC1.1 IC2.1 IC2.6 IC2.7 J3.1 JP1.1 JP2.1 JP3.1 JP4.1 JP5.3 pad.3 R1.1 S1.1 S1.2 U1.12 U1.18 U1.31 U1.47 U1.63 | length 19.7
  Top Layer w0.3: U1.12 18.603,20.74 19.06,20.74 v1(19.1,20.7) ; U1.63 25.66,25.27 25.66,25.86 v1(25.7,25.9) ; IC2.7 29.525,30.338 29.525,31.081 C20.1 29.727,31.264 30,30.991 IC2.6
  Top Layer w0.5: JP2.1 26.049,6.866 28.693,6.866 29.721,7.895 C23.2 ; JP1.1 36.225,12.131 38.007,13.913 C14.1
  Top Layer w0.6: C1.2 C1.2@10.82,11.245 ; C15.2 34.1,31.39 35.69,29.8 JP5.3
  Bottom Layer w0.3: C6.2 18.791,20.74 19.06,20.74 v1(19.1,20.7) ; C10.1 25.7,25.064 v1(25.7,25.9)
I2C_SCL: IC2.13 JP5.2 R5.1 U1.58 | length 15
  Top Layer w0.3: U1.58 28.226,24.3 v1(29,24.3) ; v1(29.5,27.4) 30,27.9 IC2.13
  Bottom Layer w0.3: R5.1 R5.1@28.298,27.129 ; v1(29,24.3) 28.298,25.002 R5.1@28.298,27.129 ; JP5.2 35.96,27.4 v1(29.5,27.4) 29.444,27.4 29.172,27.129 R5.1@28.298,27.129
I2C_SDA: IC2.14 JP5.1 R4.1 U1.59 | length 13.9
  Top Layer w0.3: U1.59 29.593,26.374 R4.1 R4.1@29.628,26.442 ; IC2.14 30.5,27.314 R4.1@29.628,26.442 ; JP5.1 35.45,25.37 35.23,25.37 34.158,26.442 R4.1@29.628,26.442
IRQ: J3.8 U1.16 | length 22
  Top Layer w0.3: v1(16,19.4) 16.557,19.957 U1.16
  Bottom Layer w0.3: J3.8 7.938,32.022 7.938,22.979 11.892,19.024 15.568,19.024 15.944,19.4 v1(16,19.4)
LED_1: R13.2 U1.8 | length 10.8
  Top Layer w0.3: U1.8 20.031,22.14 20.512,22.14 v1(20.552,22.1) ; v1(20.552,27.165) 20.587,27.2 22.762,27.2 24.311,28.749 R13.2
  Bottom Layer w0.3: v1(20.552,22.1) v1(20.552,27.165)
LED_2: R14.2 U1.9 | length 11.5
  Top Layer w0.3: U1.9 19.918,21.546 21.19,21.546 21.244,21.6 v1(21.3,21.6) ; v1(20.5,28) 21.65,28 22.4,28.75 R14.2
  Bottom Layer w0.3: v1(20.5,28) 21.106,27.394 21.106,21.85 21.3,21.656 v1(21.3,21.6)
MISO: J3.7 U1.10 | length 18.1
  Top Layer w0.3: J3.7 13.303,33.497 14.8,32 14.8,26.481 15.936,25.345 18.3,22.981 18.3,22.457 U1.10
MOSI: J3.6 U1.11 | length 20.2
  Top Layer w0.3: J3.6 7.528,32.022 13.952,32.022 14.35,31.624 14.35,26.295 16.886,23.759 17.396,23.249 17.396,22.654 U1.11
NetD1_2: D1.2 R2.1 | length 1.4
  Top Layer w0.3: D1.2 3.753,23.003 R2.1
NetD6_2: D6.2 R13.1 | length 1.5
  Top Layer w0.3: R13.1 24.45,30.288 D6.2
NetD7_2: D7.2 R14.1 | length 1.5
  Top Layer w0.3: R14.1 D7.2
Reset: C13.2 R3.1 S1.3 S1.4 U1.7 | length 13.7
  Top Layer w0.3: S1.3 11.965,31.06 12.75,30.275 v1(12.75,30.25) ; v1(15.7,28.2) 15.7,28.144 16.101,27.743 16.101,26.908 18.525,24.485 C13.2 18.525,24.354 U1.7
  Bottom Layer w0.3: R3.1 12.75,29.414 v1(12.75,30.25) 14.846,28.154 15.146,28.154 15.152,28.16 15.66,28.16 v1(15.7,28.2)
SCK: J3.5 U1.29 | length 33.4
  Top Layer w0.3: v1(4,29.5) 7.546,29.5 J3.5 ; v1(10.8,18.6) 17.118,12.282 20.45,12.282 U1.29
  Bottom Layer w0.3: v1(4,29.5) 4,23.5 8.9,18.6 v1(10.8,18.6)
SWCLK: JP1.3 U1.49 | length 7.6
  Top Layer w0.3: U1.49 30.862,20.572 32.428,20.572 35.789,17.212 JP1.3
SWDIO: JP1.2 U1.46 | length 7.4
  Top Layer w0.3: U1.46 31.207,14.5 35.854,14.5 JP1.2
U_RX: JP2.3 U1.43 | length 5.1
  Top Layer w0.3: U1.43 29.359,14.227 29.359,10.741 JP2.3
U_TX: JP2.2 U1.42 | length 6.9
  Top Layer w0.3: JP2.2 27.563,8.945 27.563,11.128 28.741,12.306 28.741,14.138 U1.42
Vbat: C1.1 IC1.3 JP4.4
pads on no net: IC2.2 IC2.3 IC2.4 IC2.9 IC2.10 IC2.11 JP4.2 JP4.3 U1.2 U1.3 U1.4 U1.5 U1.6 U1.17 U1.20 U1.21 U1.22 U1.23 U1.24 U1.25 U1.26 U1.27 U1.28 U1.30 U1.33 U1.34 U1.35 U1.36 U1.37 U1.39 U1.40 U1.41 U1.44 U1.45 U1.50 U1.51 U1.52 U1.53 U1.54 U1.55 U1.56 U1.57

## Polygon pours and split planes (outlines as drawn)
GND on Top Layer "top_gnd" (solid, pour order 2): -0.1,2.948 -0.1,38.702 cw(c2.948,38.702) 2.948,41.75 36.202,41.75 cw(c36.202,38.702) 39.25,38.702 39.25,2.948 cw(c36.202,2.948) 36.202,-0.1 2.948,-0.1 cw(c2.948,2.948)
GND on Bottom Layer "bot_gnd" (solid, pour order 3): -0.1,2.948 -0.1,38.702 cw(c2.948,38.702) 2.948,41.75 36.202,41.75 cw(c36.202,38.702) 39.25,38.702 39.25,2.948 cw(c36.202,2.948) 36.202,-0.1 2.948,-0.1 cw(c2.948,2.948)

## Other copper
Top Layer:
  rectangle net +3V3: 5,19.7 11.7,20.7
  rectangle net +3V3: 5.9,12.2 7.7,20.2
  rectangle net Vbat: 8.3,10.4 9.6,14
  region net +3V3: 5.7,20.4 5.7,22.9 9.7,22.9 11,21.6 11,20.4
  region net +3V3: 7.3,10.5 5.9,10.5 5.9,13.1 6.3,13.5 7.3,13.5
  region net Vbat: 4.8,3.5 4.7,3.6 2.7,3.6 2.7,6.1 6.5,9.9 8.1,9.9 8.2,10 8.2,11.8 9.9,11.8 10.1,11.6 9.9,11.4 8.8,7.1 5.7,6.5 5,5.8

## Silkscreen, mask and mechanical layers (free items; w line width, h text height)
Top Overlay:
  lines w0.254: 16.7,0.2 22.8,0.2 22.8,5 16.7,5 16.7,0.2
  text "3V3" at 35,21.418 h1.52
  text "CLK" at 32.6,16.911 h1
  text "DIO" at 32.8,14.812 h1
  text "3V3" at 32.313,10.513 h1.52 r315
  text "GND" at 34.7,9.618 h1.52
  text "RX" at 31.1,8.4 h1.52 r315
  text "4V4-12V" at 13.054,7.054 h1.52
  text "TX" at 28.9,6.7 h1.52 r315
  text "GND" at 26.513,5.513 h1.52 r315
  text "Designed" at 17.1,3.782 h1.5
  text "by" at 19.2,2.382 h1.5
  text "-" at 10.976,1.819 h1.52
  text "+" at 5.754,1.7 h1.52
  text "Bakhtiyar" at 17,0.782 h1.5
Bottom Overlay:
  lines w0.254: 1.9,6.6 10.1,6.6 10.1,14.8 1.9,14.8 1.9,6.6
  text "Remote" at 9.173,12.92 h2
  text "IMU" at 7.5,10.884 h2
  text "SENSOR" at 9.735,8.824 h2
  text "V1.0" at 7.6,7.12 h1.7
  text "-" at 11.946,1.792 h1.52
  text "+" at 6.746,1.7 h1.52
Mechanical 1:
  the board outline again, w0.254

## Text inside footprints (layer, text, board x,y; h text height)
JP1: Top 3D Body "1" at 38.565,12.64 h1 r180
JP2: Top 3D Body "1" at 28.063,5.571 h1 r135
JP3: Top 3D Body "1" at 28.822,39.79 h1 r270
JP4: Top 3D Body "1" at 10.972,7.34 h1 r270
JP5: Top 3D Body "1" at 38.64,25.228 h1 r180